# Altium PCB Wuhu_V1.PcbDoc
Units mil, origin at the board's own origin, x right, y up, seen from the top; angles counter-clockwise.
Board outline 2285 x 2495 mil, 2 copper layers (Top Layer, Bottom Layer); 16 components, 37 nets, 128 pads, 36 vias.
Unrouted connection lines stored in the file: 3.
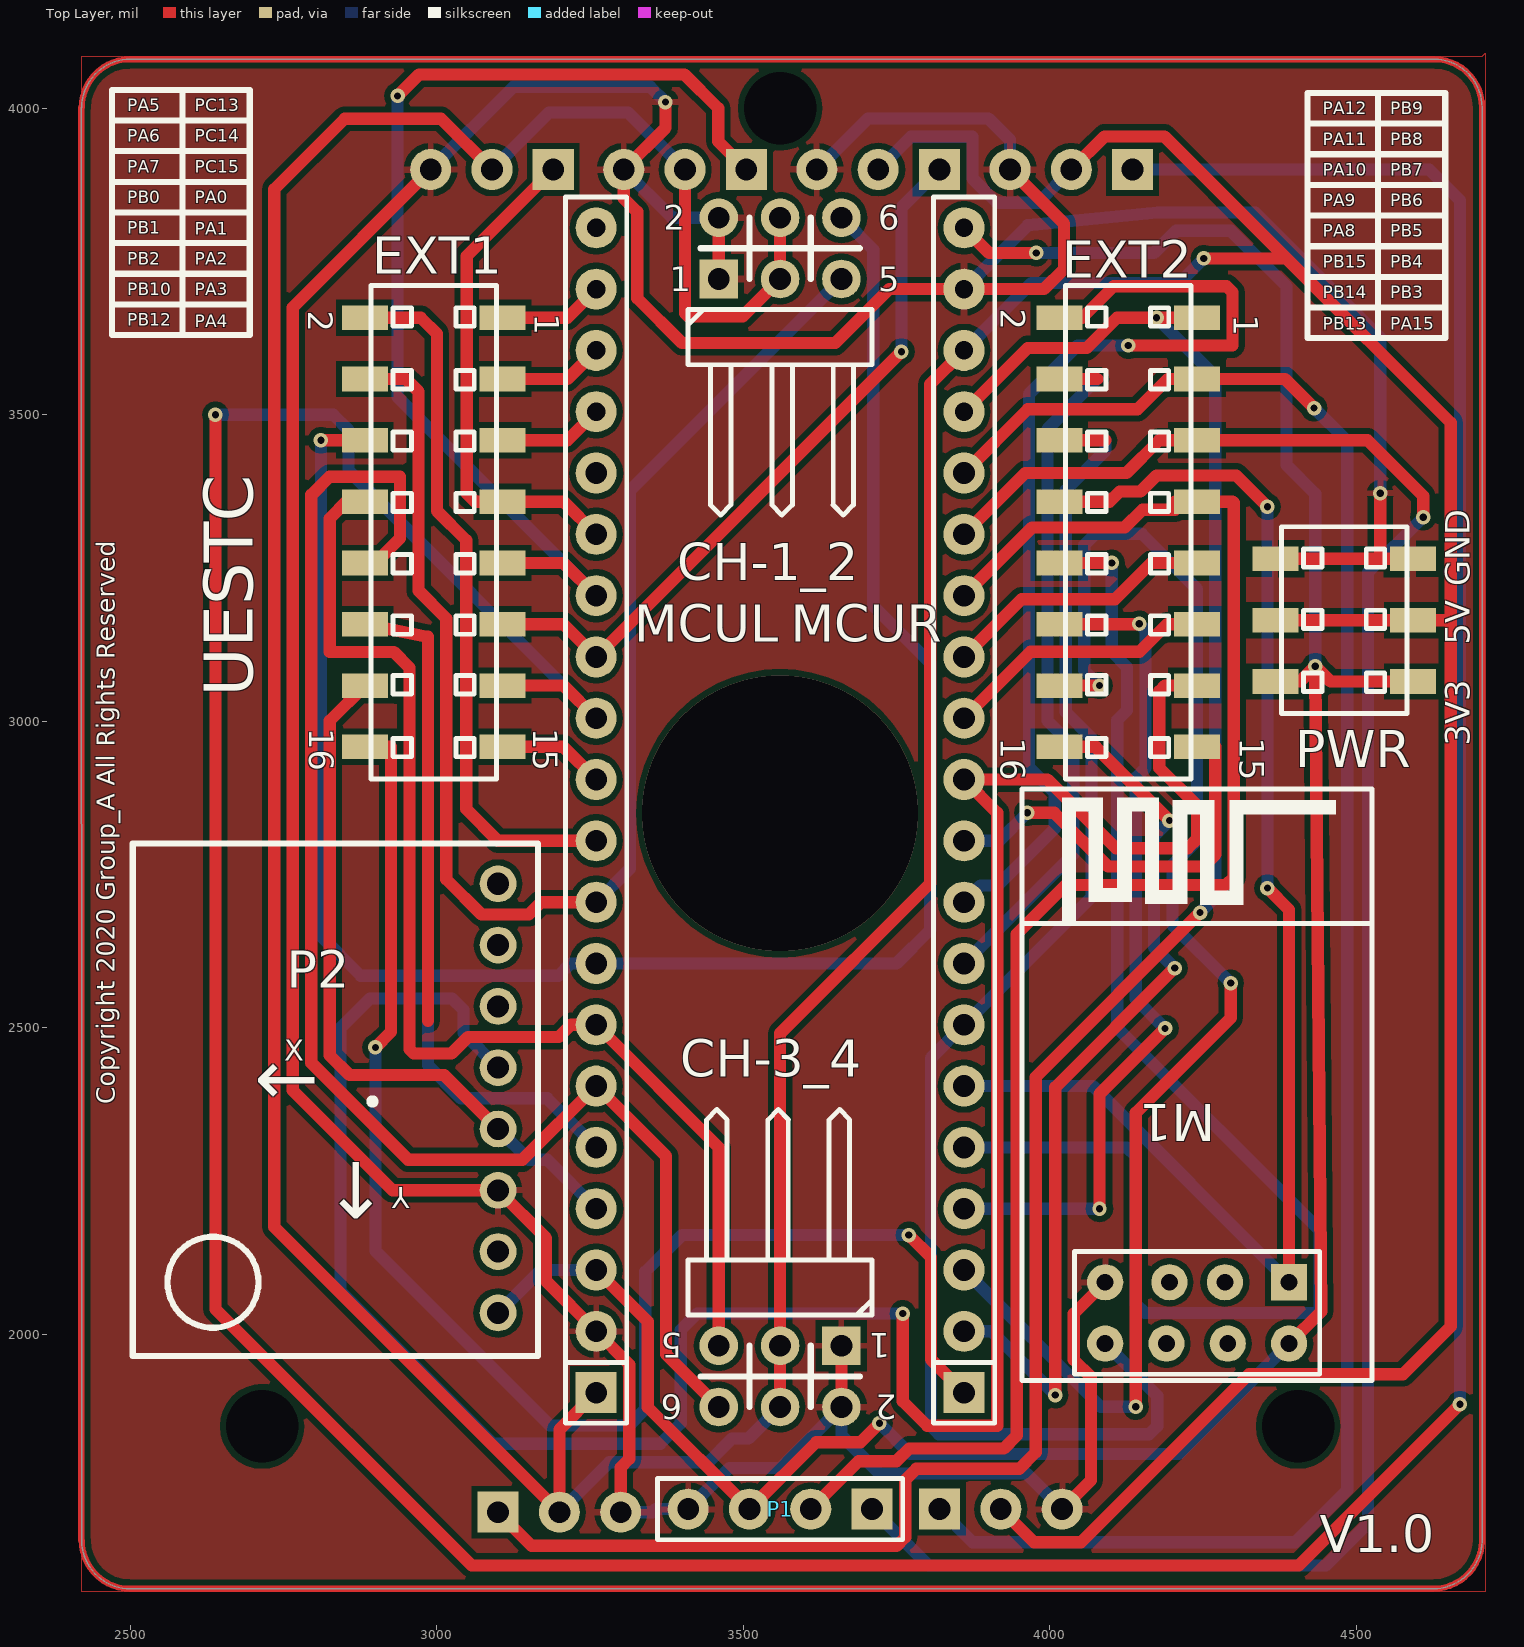
[diagram p0: Top Layer view]
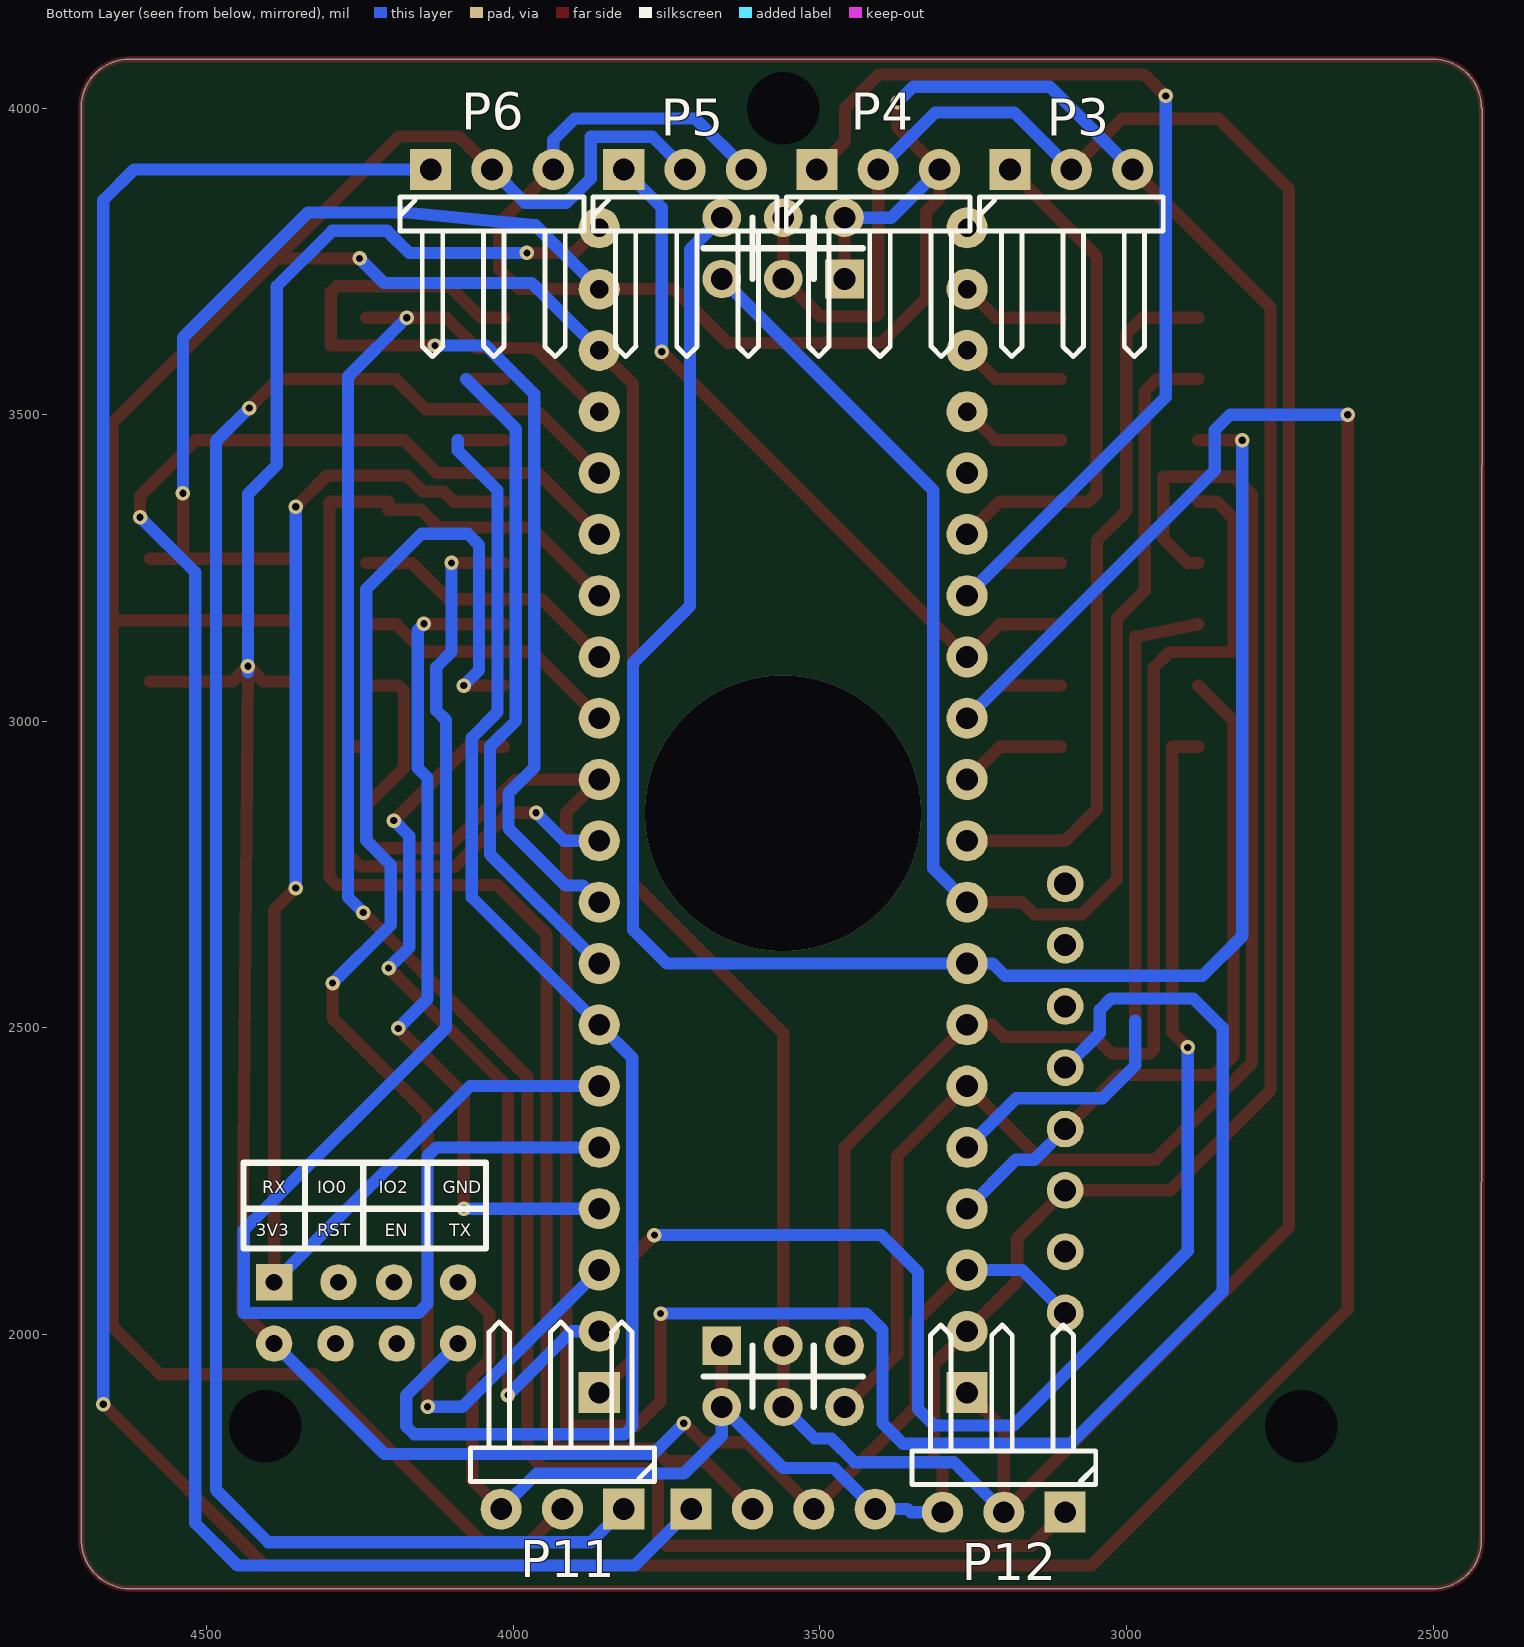
[diagram p1: Bottom Layer view, seen from below]

## Layer stack, top to bottom
Top Solder: solder mask 0.4, Solder Resist, Dk 3.5
Top Layer: signal copper 1.4
Dielectric 1: dielectric 12.6, FR-4, Dk 4.8
Bottom Layer: signal copper 1.4
Bottom Solder: solder mask 0.4, Solder Resist, Dk 3.5

## Board outline
2420.94,1664.06 ccw(c2500,1664.06) 2500,1585 4625,1585 ccw(c4625,1665) 4704.96,1662.5 4705,1662.5 4705,4001.72 ccw(c4626.72,4001.72) 4626.72,4080 2500,4080 ccw(c2500,4000.94) 2420.94,4000.94 2420,4000.94

## Design rules (kind name [scope] priority, off if disabled: settings)
Clearance [All] p1: gap=10 ignorepadtopadclearanceinfootprint=FALSE except(0: Arc-Hole Track-Hole SMDPad-Hole THPad-Hole Via-Hole Fill-Hole Poly-Hole Region-Hole Text-Hole)
HoleToHoleClearance [All] p1: gap=6 allowstackedmicrovias=TRUE
MinimumSolderMaskSliver [All] p1: minsoldermaskwidth=0
PolygonConnect [All] p1: connectstyle=Relief reliefconductorwidth=10 reliefentries=4 polygonreliefangle="90 Angle" airgapwidth=10
RoutingVias [All] p1: holewidth=11.81 width=23.62 viastyle="Through Hole" minholewidth=11.81 minwidth=23.62 maxholewidth=11.81 maxwidth=23.62
SilkToSilkClearance [All] p1: silktosilkclearance=0
SilkToSolderMaskClearance [IsPad] p1: minsilkscreentomaskgap=0 clearancetoexposedcopper=TRUE
SolderMaskExpansion [All] p1: expansion=4
Width Width_3 [(InNet('3V3') OR InNet('5V') OR InNet('GND'))] p1: maxlimit=20 minlimit=15 preferedwidth=20
Width Width_2 [All] p2: maxlimit=20 minlimit=15 preferedwidth=20
Width Width_1 [InNet('GND')] p3: maxlimit=20 minlimit=15 preferedwidth=20
Width [InNet('3V3')] p4: maxlimit=20 minlimit=15 preferedwidth=20
26 further rules are at their usual default settings.

## Components (designator, comment, footprint, x,y, rotation, side; value= is the part's Value field where it differs from the comment)
CH-1_2 "Header3X2" HDR2.54-WI-2x3P 3560,3771.56 r0 top
CH-3_4 "Header3X2" HDR2.54-WI-2x3P 3560,1931.56 r180 top
EXT1 "Header 8X2" HDR2.54-M-LS-2x8P 2995,3308.32 r270 top
EXT2 "Header 8X2" HDR2.54-M-LS-2x8P 4127.8,3308.32 r270 top
M1 "ESP-01S" "ESP-01&01S Module" 4240.28,2035 r0 top
MCUL "HDR-1X20" HDR2.54-M-LI-20P 3260,2855 r90 top
MCUR "HDR-1X20" HDR2.54-M-LI-20P 3860,2855 r90 top
P1 "OLED" HDR2.54-M-LI-4P 3560,1715 r180 top
P2 "GY-86" GY-86 2900,2385 r180 top
P3 "CH1_in" HDR2.54-WI-3P 3090,3900 r180 bottom
P4 "CH2_in" HDR2.54-WI-3P 3405,3900 r180 bottom
P5 "CH3_in" HDR2.54-WI-3P 3720,3900 r180 bottom
P6 "CH4_in" HDR2.54-WI-3P 4035,3900 r180 bottom
P11 "CH5_in" HDR2.54-WI-3P 3920,1715 r0 bottom
P12 "CH6_in" HDR2.54-WI-3P 3200,1710 r0 bottom
PWR "Header3X2" HDR2.54-M-LS-2x3P 4480,3165 r90 top

## Footprints (in the part's own frame and the unit in brackets; to place one, negate y for a bottom-side part, rotate by r counter-clockwise, add the part's x,y. Pads: shape width x height; smd on the part's side, far side on the other; paste and mask are expansions set on the pad)
"ESP-01&01S Module" [mm]
  rect 1.5x1.5 hole 0.7: 1(3.81,1.27)
  round 1.5 hole 0.7: 2(1.15,1.27) 3(-1.15,1.27) 4(-3.81,1.27) 5(3.81,-1.27) 6(1.27,-1.27) 7(-1.27,-1.27) 8(-3.81,-1.27)
  silkscreen extent -7.25,-2.79 7.25,21.71
GY-86 [mil]
  round 60 hole 36: 1(-200,350) 2(-200,250) 3(-200,150) 4(-200,50) 5(-200,-50) 6(-200,-150) 7(-200,-250) 8(-200,-350)
  silkscreen extent -265,-416 396,420
HDR2.54-M-LI-4P [mm] "排母，4脚"
  rect 1.7x1.7 hole 0.9: 1(-3.81,0)
  round 1.7 hole 0.9: 2(-1.27,0) 3(1.27,0) 4(3.81,0)
  silkscreen extent -5.08,-1.27 5.08,1.27, body extent -5.08,-1.27 5.08,1.27, height 8.5
HDR2.54-M-LI-20P [mm] "排母，20脚"
  rect 1.7x1.7 hole 0.9: 1(-24.13,0)
  round 1.7 hole 0.9: 2(-21.59,0) 3(-19.05,0) 4(-16.51,0) 5(-13.97,0) 6(-11.43,0) 7(-8.89,0) 8(-6.35,0) 9(-3.81,0) 10(-1.27,0) 11(1.27,0) 12(3.81,0) 13(6.35,0) 14(8.89,0) 15(11.43,0) 16(13.97,0)
  round 1.7 hole 0.762: 17(16.51,0) 18(19.05,0) 19(21.59,0) 20(24.13,0)
  silkscreen extent -25.4,-1.27 25.4,1.27, body extent -25.4,-1.27 25.4,1.27, height 8.5
HDR2.54-M-LS-2x3P [mm] "脚距：2.54mm，贴片双排母"
  rect 1.02x1.9 smd: 1(-2.54,2.85) 2(-2.54,-2.85) 3(0,2.85) 4(0,-2.85) 5(2.54,2.85) 6(2.54,-2.85)
  silkscreen extent -3.87,-2.6 3.87,2.6, body extent -3.84,-3.2 3.84,3.2, height 5.15
HDR2.54-M-LS-2x8P [mm] "脚距：2.54mm，贴片双排母"
  rect 1.02x1.9 smd: 1(-8.89,2.85) 2(-8.89,-2.85) 3(-6.35,2.85) 4(-6.35,-2.85) 5(-3.81,2.85) 6(-3.81,-2.85) 7(-1.27,2.85) 8(-1.27,-2.85) 9(1.27,2.85) 10(1.27,-2.85) 11(3.81,2.85) 12(3.81,-2.85) 13(6.35,2.85) 14(6.35,-2.85) 15(8.89,2.85) 16(8.89,-2.85)
  silkscreen extent -10.23,-2.6 10.22,2.6, body extent -10.19,-3.2 10.19,3.2, height 5.15
HDR2.54-WI-2x3P [mm] "双排弯脚排针，3x2脚"
  rect 1.6x1.6 hole 0.9: 1(-2.54,-1.27)
  round 1.6 hole 0.9: 2(-2.54,1.27) 3(0,-1.27) 4(0,1.27) 5(2.54,-1.27) 6(2.54,1.27)
  silkscreen extent -3.81,-11.06 3.81,1.27, body extent -3.81,-11.23 3.81,1.62, height 5.1
HDR2.54-WI-3P [mm] "弯脚排针，3脚"
  rect 1.7x1.7 hole 0.9: 1(-2.54,0)
  round 1.7 hole 0.9: 2(0,0) 3(2.54,0)
  silkscreen extent -3.81,-7.76 3.81,-1.14, body extent -3.81,-7.77 3.81,1.27, height 4.85

## Part data
CH-1_2 CH-3_4 PWR: library part "Header 3X2", "3*2P接插件"
EXT1 EXT2: "8*2P接插件"
M1: library part "ESP-01&01S Module"
MCUL MCUR: library part "Header 20", "20P接插件"
P1: library part MHDR1X4, "Header, 4-Pin", LatestRevisionDate=17-Jul-2002, LatestRevisionNote="Re-released for DXP Platform.", Publisher="Altium Limited"
P2: library part MHDR1X8, "Header, 8-Pin", LatestRevisionDate=17-Jul-2002, LatestRevisionNote="Re-released for DXP Platform.", Publisher="Altium Limited"
P3 P4 P5 P6 P11 P12: library part MHDR1X3, "Header, 3-Pin", LatestRevisionDate=17-Jul-2002, LatestRevisionNote="Re-released for DXP Platform.", Publisher="Altium Limited"

## Via types
v1: diameter 23.62, hole 11.81, Top Layer to Bottom Layer, 32 vias
v2: diameter 50/50 (per signal layer), hole 118.11, Top Layer to Bottom Layer, 3 vias
v3: diameter 450, hole 450, Top Layer to Bottom Layer, 1 vias

## Nets (pads, with @x,y where several pads share a name; then routed paths per layer and width w, separated by ;. In a path a pad name is that pad's centre, name@x,y a point inside that pad or via, vN(x,y) a via of type N, cw(c..) or ccw(c..) an arc to the next point about the centre after c; other vN are vias at no path point)
3V3: M1.5 MCUL.3 MCUR.20 P1.3 P2.1 PWR.1 PWR.2 | length 4322.4
  Top Layer w20: MCUL.3 3344,2021 3344,1881 P1.3 3619,1824 3691,1824 v1(3722,1855) ; MCUR.20 3901,3764 v1(3978,3764) ; PWR.1 4408,3065 v1(4433,3090) 4458,3065 PWR.2 ; M1.5 4442.77,2037.5 v1@4433,3080.23
  Bottom Layer w20: P2.1 3170,2105 MCUL.3 ; v1(3722,1855) 3772,1805 4210.28,1805 M1.5 ; v1(3978,3764) 4170,3764 4206,3800 4295.6,3800 4386,3709.6 4386,3418 4433,3371 v1(4433,3090) v1@4433,3080.23
5V: CH-1_2.3 CH-1_2.4 CH-3_4.3 CH-3_4.4 MCUL.1 MCUR.18 P3.2 P4.2 P5.2 P6.2 P11.2 P12.2 PWR.3 PWR.4 | length 10724.3
  Top Layer w20: P3.2 3007,3983 2850,3983 2735,3868 2735,2175 P12.2 3200,1845 MCUL.1 ; P4.2 3405,3665.65 3410.18,3660.47 3498.91,3660.47 CH-1_2.3 CH-1_2.4 ; CH-3_4.4 CH-3_4.3 3560,2491 3805,2736 3805,3550 MCUR.18 ; P11.2 3974,1661 4051,1661 4325,1935 4576,1935 4654,2013 4654,3165 ; P6.2 4089,3954 4187,3954 4386,3755 ; v1(4251,3755) 4386,3755 ; PWR.3 PWR.4 4654,3165 ; 4386,3755 4654,3487 4654,3165
  Bottom Layer w20: P3.2 3183,3993 3312,3993 P4.2 ; P12.2 3281.53,1791.53 3443.28,1791.53 3481.74,1830 3508.44,1830 CH-3_4.4 ; P5.2 3773.47,3953.47 3874,3953.47 3874,3885.39 3913.39,3846 3981,3846 P6.2 ; MCUR.18 3970,3715 4211,3715 v1(4251,3755)
GND: CH-1_2.1 CH-1_2.2 CH-3_4.1 CH-3_4.2 M1.4 MCUL.2 MCUR.19 P1.4 P2.3 P3.3 P4.3 P5.3 P6.3 P11.3 P12.3 PWR.5 PWR.6 | length 7901.5
  Top Layer w20: P3.3 2765,3675 2765,2398 2928,2235 P2.3 3178,2157 3178,2087 MCUL.2 3314,1951 3314,1797 3300,1783 P12.3 ; v1(3373,4010) 3373,3968 P4.3 3305,3853 3327,3831 3327,3690 3400,3617 3650,3617 3738,3705 MCUR.19 3990.5,3705 4023,3737.5 4023,3812 P6.3 ; CH-1_2.1 CH-1_2.2 ; CH-3_4.2 CH-3_4.1 ; P11.3 4067,1762 4067,1930.68 4039.02,1958.67 4039.02,2033.74 M1.4 ; PWR.5 4539,3265 ; v1(4539,3372) 4539,3265 ; PWR.6 4539,3265
  Bottom Layer w20: P3.3 3125,4035 3348,4035 v1(3373,4010) ; P12.3 3352,1710 3357,1715 P1.4 3477,1782 3560.44,1782 CH-3_4.2 3660,1835 3722,1773 3962,1773 P11.3 ; P4.3 3383.44,3821.56 CH-1_2.2 ; P5.3 3703.47,3983.47 3900,3983.47 3935,3948.47 P6.3 ; MCUR.19 3964,3809 4175.6,3830 4335,3830 4539,3626 v1(4539,3372)
PA0: EXT1.7 MCUL.15 P3.1 | length 825.3
  Top Layer w20: P3.1 3049,3759 3049,3371.82 3062.5,3358.32 EXT1.7 3206.68,3358.32 MCUL.15
PA1: EXT1.9 MCUL.14 P4.1 | length 1803.4
  Top Layer w20: v1(2936,4020) 2971,4055 3404,4055 3459,4000 3459,3946 P4.1 ; EXT1.9 3206.68,3258.32 MCUL.14
  Bottom Layer w20: v1(2936,4020) 2936,3529 MCUL.14
PA2: EXT1.11 MCUL.13 P5.1 | length 1201.8
  Top Layer w20: EXT1.11 3206.68,3158.32 MCUL.13 v1(3758,3603)
  Bottom Layer w20: v1(3758,3603) 3758,3838 P5.1
PA3: EXT1.13 MCUL.12 P6.1 | length 7329.4
  Top Layer w20: v1(2639,3500) 2639,2041 3057,1623 4406,1623 v1(4669,1886) ; EXT1.13 3206.68,3058.32 MCUL.12
  Bottom Layer w20: v1(2639,3500) 2831,3500 2856,3475 2856,3409 MCUL.12 ; P6.1 4619,3900 4669,3850 v1(4669,1886)
PA4: EXT1.15 MCUL.11 | length 174.9
  Top Layer w20: EXT1.15 3206.68,2958.32 MCUL.11
PA5: EXT1.2 MCUL.10 | length 1156.7
  Top Layer w20: EXT1.2 2974,3658.32 3000.2,3632.12 3000.2,3343.21 3048,3295.41 3048,2857 3100,2805 MCUL.10
PA6: CH-1_2.5 EXT1.4 MCUL.9 | length 2369
  Top Layer w20: EXT1.4 2950,3558.32 2970.2,3538.12 2970.2,3213.12 3015.5,3167.82 3015.5,2742.5 3073,2685 3150,2685 3170,2705 MCUL.9
  Bottom Layer w20: MCUL.9 3315,2760 3315,3376.56 CH-1_2.5
PA7: CH-1_2.6 EXT1.6 MCUL.8 | length 3153.7
  Top Layer w20: v1(2811,3458.32) EXT1.6
  Bottom Layer w20: v1(2811,3458.32) 2811,2650 2876,2585 3198,2585 3218,2605 MCUL.8 3750,2605 3805,2660 3805,3095 3712,3188 3712,3769.56 CH-1_2.6
PA8: EXT2.10 MCUR.5 | length 2295.4
  Top Layer w20: EXT2.10 v1(4101,3258.32)
  Bottom Layer w20: MCUR.5 4126,2305 4140,2291 4140,2050 4155,2035 4440,2035 4440,2170 4110,2500 4110,3002 4126,3018 4126,3088.32 4101,3113.32 v1(4101,3258.32)
PA9: EXT2.8 M1.1 MCUR.6 | length 2320.7
  Top Layer w20: EXT2.8 4097.32,3358.32 4114,3375 4148,3375 4174,3401 4304,3401 v1(4355,3350) ; v1(4355,2728) 4390.28,2692.72 M1.1
  Bottom Layer w20: MCUR.6 4070.28,2405 M1.1 ; v1(4355,2728) v1(4355,3350)
PA10: EXT2.6 M1.8 MCUR.7 | length 2385.8
  Top Layer w20: EXT2.6 4090.68,3458.32
  Bottom Layer w20: M1.8 4175,1900.28 4175,1850.28 4161.72,1837 3819,1837 3806,1850 3806,2451 MCUR.7 4068,2713 4068,2973 4026,3015 4026,3377 4090.68,3441.68 4090.68,3458.32
PA11: EXT2.4 MCUR.8 | length 1139.9
  Top Layer w20: EXT2.4 4077.32,3558.32
  Bottom Layer w20: MCUR.8 4038,2783 4038,2959 3996,3001 3996,3477 4077.32,3558.32
PA12: EXT2.2 MCUR.9 | length 1683.5
  Top Layer w20: EXT2.2 4053,3658.32 4104.37,3709.69 4288.31,3709.69 4298,3700 4298,3613 v1(4128,3613)
  Bottom Layer w20: MCUR.9 3887,2732 3915,2732 4008,2825 4008,2882.81 3966,2924.81 3966,3534 4045,3613 v1(4128,3613)
PA15: EXT2.15 MCUR.10 | length 679.1
  Top Layer w20: v1(3963,2851) 4007,2851 4095,2763 4250,2763 4270,2783 4270,2958.32 EXT2.15
  Bottom Layer w20: MCUR.10 3917,2805 v1(3963,2851)
PB0: CH-3_4.5 EXT1.8 MCUL.7 | length 1983
  Top Layer w20: EXT1.8 2852.71,3358.32 2825.39,3331 2825.39,3113 2930,3113 2955.5,3087.5 2955.5,2465 2962.5,2458 3024,2458 3051,2485 3199,2485 3219,2505 MCUL.7 3460,2305 CH-3_4.5
PB1: CH-3_4.6 EXT1.10 MCUL.6 | length 2444.3
  Top Layer w20: EXT1.10 2900,3258.32 2940.2,3298.52 2940.2,3399 2825,3399 2795.39,3369.39 2795.39,2442.61 2953,2285 3140,2285 MCUL.6 3374,2291 3374,1967.56 CH-3_4.6
PB2: EXT1.12 MCUL.5 | length 1133.5
  Top Layer w20: EXT1.12 2985.5,3137.82 2985.5,2511.5
  Bottom Layer w20: 2985.5,2511.5 2985.5,2439.04 3039.54,2385 3180,2385 MCUL.5
PB3: EXT2.13 MCUR.11 P2.5 | length 4127.2
  Top Layer w20: v1(3760,2034) 3760,1891 3800,1851 3914,1851 3914,2851 MCUR.11 3995.94,2905 4107.94,2793 4225,2793 4240,2808 4240,2862.5 4178.5,2924 4178.5,3048.88 4187.93,3058.32 EXT2.13
  Bottom Layer w20: P2.5 3043.41,2491.59 3043.41,2529.59 3025,2548 2891,2548 2843,2500 2843,2070 3091.47,1821.53 3364.53,1821.53 3398,1855 3398,2007 3425,2034 v1(3760,2034)
PB4: EXT2.11 MCUR.12 | length 443.5
  Top Layer w20: MCUR.12 3968.32,3113.32 4146.32,3113.32 4191.32,3158.32 EXT2.11
PB5: EXT2.9 MCUR.13 | length 443.5
  Top Layer w20: MCUR.13 3954,3199 4106.1,3199 4165.42,3258.32 EXT2.9
PB6: EXT2.7 MCUR.14 P1.2 | length 2719
  Top Layer w20: P1.2 3688.23,1793.23 3750,1793.23 3770.77,1814 3925,1814 3946,1835 3946,2653 4026,2733 4287.5,2733 4300,2745.5 4300,3356.32 4298,3358.32 EXT2.7 4204,3358.32 4204,3345 4151,3345 4122,3316 3971,3316 MCUR.14
PB7: EXT2.5 MCUR.15 P1.1 | length 3438.6
  Top Layer w20: MCUR.15 3960,3405 4125,3405 4178.32,3458.32 EXT2.5 4518.22,3458.32 4609,3367.54 v1(4609,3333)
  Bottom Layer w20: P1.1 3802,1623 4450,1623 4519,1692 4519,3243 v1(4609,3333)
PB8: EXT2.3 MCUR.16 P11.1 | length 3164
  Top Layer w20: MCUR.16 3964,3509 4143,3509 4192.32,3558.32 EXT2.3 4383.68,3558.32 v1(4431,3511)
  Bottom Layer w20: P11.1 3874,1661 4400,1661 4485,1746 4485,3457 v1(4431,3511)
PB9: EXT2.1 MCUR.17 P12.1 | length 3473.1
  Top Layer w20: P12.1 3155,1655 3750,1655 3764,1669 3764,1762.5 3782.1,1780.6 3950,1780.6 3977,1807.6 3977,2420 v1(4245,2688) ; MCUR.17 3964,3609 4060.32,3609 4109.64,3658.32 v1(4174,3658.32) EXT2.1
  Bottom Layer w20: v1(4174,3658.32) 4270,3562.32 4270,2713 v1(4245,2688)
PB10: EXT1.14 MCUL.4 P2.4 | length 1165.2
  Top Layer w20: EXT1.14 2825.39,3000.92 2825.39,2455.11 2857.5,2423 3012,2423 P2.4
  Bottom Layer w20: P2.4 3150,2285 3180,2285 MCUL.4
PB12: EXT1.16 MCUR.1 | length 2417.5
  Top Layer w20: EXT1.16 2925.5,2958.32 2925.5,2493.5 v1(2900,2468) ; v1(3770,2162) 3806,2126 3806,1959 MCUR.1
  Bottom Layer w20: v1(2900,2468) 2900,2136 3184.47,1851.53 3313.47,1851.53 3340,1878.07 3340,2102 3400,2162 v1(3770,2162)
PB13: EXT2.16 MCUR.2 | length 1463.2
  Top Layer w20: v1(4009,1901) 4009,2403 v1(4203.57,2597.57) ; EXT2.16 4074.68,2958.32 v1(4195,2838)
  Bottom Layer w20: MCUR.2 3905,2005 v1(4009,1901) ; v1(4195,2838) 4170,2813 4170,2631.13 v1(4203.57,2597.57)
PB14: EXT2.14 MCUR.3 | length 2360.4
  Top Layer w20: EXT2.14 v1(4081,3058.32) ; v1(4140,1882) 4140,2361.29 4295,2516.29 v1(4295,2573)
  Bottom Layer w20: MCUR.3 4083,1882 v1(4140,1882) ; v1(4081,3058.32) 4056,3083.32 4056,3287.5 4074.5,3306 4150,3306 4240,3216 4240,2805.5 4200,2765.5 4200,2668 v1(4295,2573)
PB15: EXT2.12 MCUR.4 | length 1380.7
  Top Layer w20: EXT2.12 4145.32,3158.32 v1(4146,3159) ; v1(4081,2205) 4081,2392 v1(4188,2499)
  Bottom Layer w20: MCUR.4 v1(4081,2205) ; v1(4146,3159) 4156,3149 4156,2924 4140,2908 4140,2547 v1(4188,2499)
PC13: EXT1.1 MCUL.19 | length 172.1
  Top Layer w20: EXT1.1 3213.32,3658.32 MCUL.19
PC14: EXT1.3 MCUL.18 | length 172.1
  Top Layer w20: EXT1.3 3213.32,3558.32 MCUL.18
PC15: EXT1.5 MCUL.17 | length 172.1
  Top Layer w20: EXT1.5 3213.32,3458.32 MCUL.17
RST: MCUL.16
VBAT: MCUL.20
pads on no net: M1.2 M1.3 M1.6 M1.7 P2.2 P2.6 P2.7 P2.8
copper on no net: | length 9422.3
  Top Layer w10: 2420,1664.06 2420,4000.94 ; 2420.94,1664.06 ccw(c2500,1664.06) 2500,1585 4625,1585 ccw(c4625,1665) 4704.96,1662.5 ; 2420.94,4000.94 cw(c2500,4000.94) 2500,4080 4626.72,4080 cw(c4626.72,4001.72) 4705,4001.72 4705,1662.5
  other v2: 2715,1850 4405,1850 3560,4000
  other v3: 3560,2850

## Polygon pours and split planes (outlines as drawn)
no net on Top Layer "Top Layer-GND" (solid, pour order 6): 2420.94,4085 4705,4085 4710,4090 4710,1580 2420.94,1580
GND on Top Layer "Top Layer-GND" (solid, pour order 0): 2420.94,4085 4705,4085 4710,4090 4710,1580 2420.94,1580

## Silkscreen, mask and mechanical layers (free items; w line width, h text height)
Top Overlay:
  lines w10: 2470,3680 2695,3680 ; 2470,3730 2695,3730 ; 2470,3780 2695,3780 ; 2470,3830 2695,3830 ; 2470,3880 2690,3880 ; 2470,3930 2695,3930 ; 2470,3980 2695,3980 ; 2585,3630 2585,4030 ; 4420,3675 4645,3675 ; 4420,3725 4645,3725 ; 4420,3775 4645,3775 ; 4420,3825 4645,3825 ; 4420,3875 4640,3875 ; 4420,3925 4645,3925 ; 4420,3975 4645,3975 ; 4535,3625 4535,4025 ; 2470,3630 2690,3630 2695,3630 2695,4030 2470,4030 2470,3630 ; 4420,3625 4420,4025 4645,4025 4645,3625 4640,3625 4420,3625
  text "PA5" at 2495,3995 h20
  text "PC13" at 2605,3995 h20
  text "PA12" at 4445,3990 h20
  text "PB9" at 4555,3990 h20
  text "PA6" at 2495,3945 h20
  text "PC14" at 2605,3945 h20
  text "PA11" at 4445,3940 h20
  text "PB8" at 4555,3940 h20
  text "PA7" at 2495,3895 h20
  text "PC15" at 2605,3895 h20
  text "PA10" at 4445,3890 h20
  text "PB7" at 4555,3890 h20
  text "PB0" at 2495,3845 h20
  text "PA0" at 2605,3845 h20
  text "PA9" at 4445,3840 h20
  text "PB6" at 4555,3840 h20
  text "PB1" at 2495,3795 h20
  text "PA1" at 2605,3794 h20
  text "PA8" at 4445,3790 h20
  text "PB5" at 4555,3790 h20
  text "PB2" at 2495,3745 h20
  text "PA2" at 2605,3745 h20
  text "PB15" at 4445,3740 h20
  text "PB4" at 4555,3740 h20
  text "PB10" at 2495,3695 h20
  text "PA3" at 2605,3695 h20
  text "PB14" at 4445,3690.47 h20
  text "PB3" at 4555,3690 h20
  text "PB12" at 2495,3645 h20
  text "PA4" at 2605,3643 h20
  text "PB13" at 4445,3639 h20
  text "PA15" at 4555,3639 h20
  text "UESTC" at 2700,3040 h80 r90
  text "Copyright 2020 Group_A All Rights Reserved" at 2475,2375 h30 r90
  text "V1.0" at 4440.28,1645 h60
Bottom Overlay:
  lines w10: 4045,2205 4440,2205 ; 4140,2140 4140,2280 ; 4245,2140 4245,2280 ; 4340,2140 4340,2275 ; 4045,2140 4045,2280 4440,2280 4440,2140 4045,2140
  text "GND" at 4115,2230 h20
  text "IO2" at 4220,2230 h20
  text "IO0" at 4320,2230 h20
  text "RX" at 4410,2230 h20
  text "TX" at 4105,2160 h20
  text "EN" at 4210,2160 h20
  text "RST" at 4320,2160 h20
  text "3V3" at 4420,2160 h20

## Text inside footprints (layer, text, board x,y; h text height)
CH-1_2: Top Overlay "6" at 3720,3801.56 h40; Top Overlay "5" at 3720,3701.56 h40; Top Overlay "2" at 3370,3801.56 h40; Top Overlay "1" at 3380,3701.56 h40
CH-3_4: Top Overlay "6" at 3400,1901.56 h40 r180; Top Overlay "5" at 3400,2001.56 h40 r180; Top Overlay "2" at 3750,1901.56 h40 r180; Top Overlay "1" at 3740,2001.56 h40 r180
EXT1: Top Overlay "2" at 2790,3670 h40 r270; Top Overlay "1" at 3160,3665 h40 r270; Top Overlay "15" at 3157.2,2988.32 h40 r270; Top Overlay "16" at 2792.2,2988.32 h40 r270
EXT2: Top Overlay "2" at 3920,3673.32 h40 r270; Top Overlay "1" at 4300,3663.32 h40 r270; Top Overlay "15" at 4310,2973.32 h40 r270; Top Overlay "16" at 3920,2973.32 h40 r270
P2: Top Overlay "X" at 2750.95,2435 h59.05; Top Overlay "Y" at 2955.95,2251.22 h59.05 r180; Top Overlay "↑" at 2920.95,2311.22 h157.48 r180; Top Overlay "↑" at 2830.95,2361.22 h157.48 r90
PWR: Top Overlay "5V" at 4685,3125 h40 r90; Top Overlay "3V3" at 4685,2960 h40 r90; Top Overlay "GND" at 4685,3220 h40 r90